# EAGLE board pulse-generator (EAGLE 7.7.0)
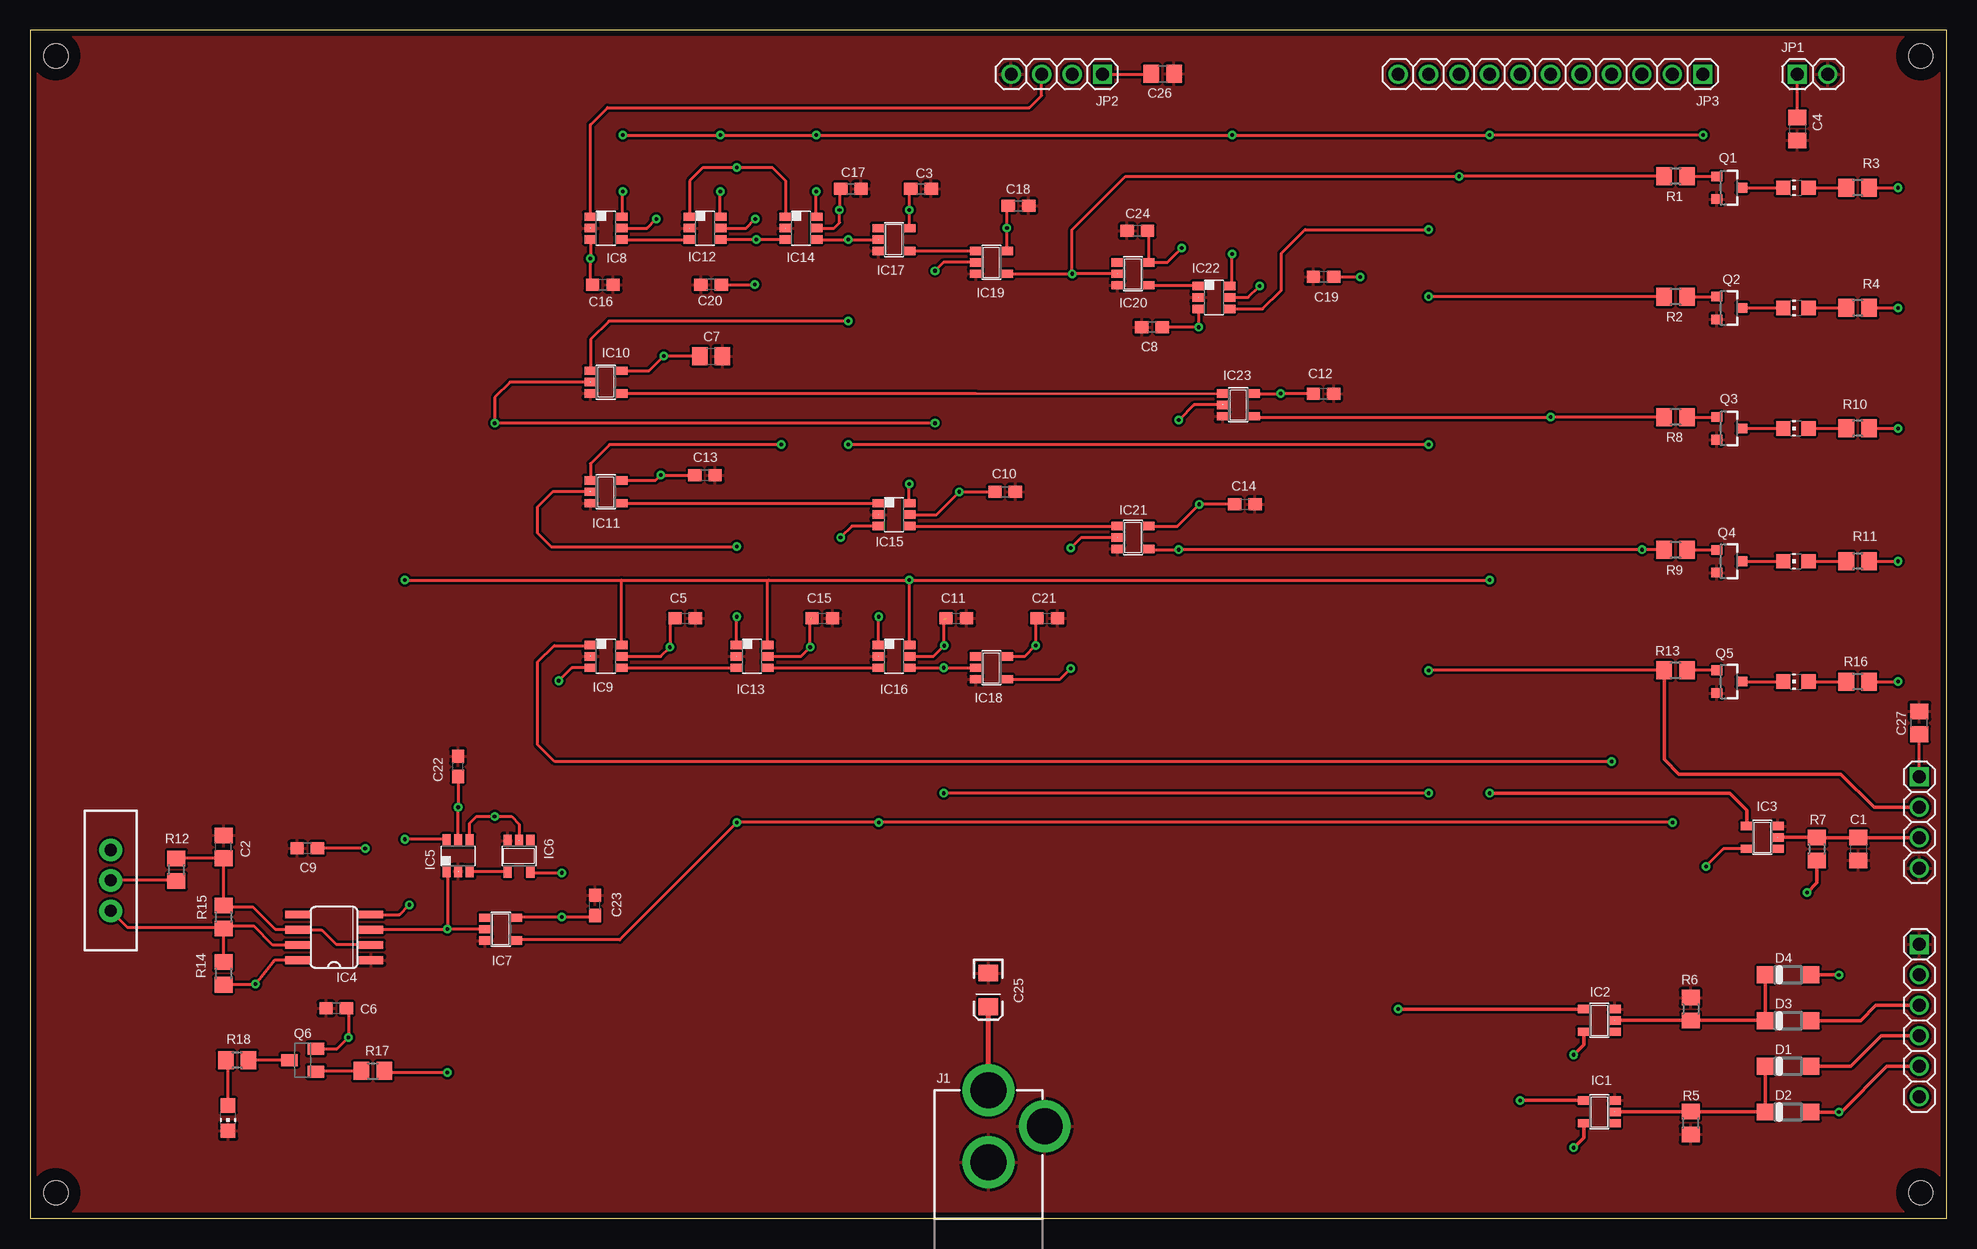
[diagram p0: board, top side]
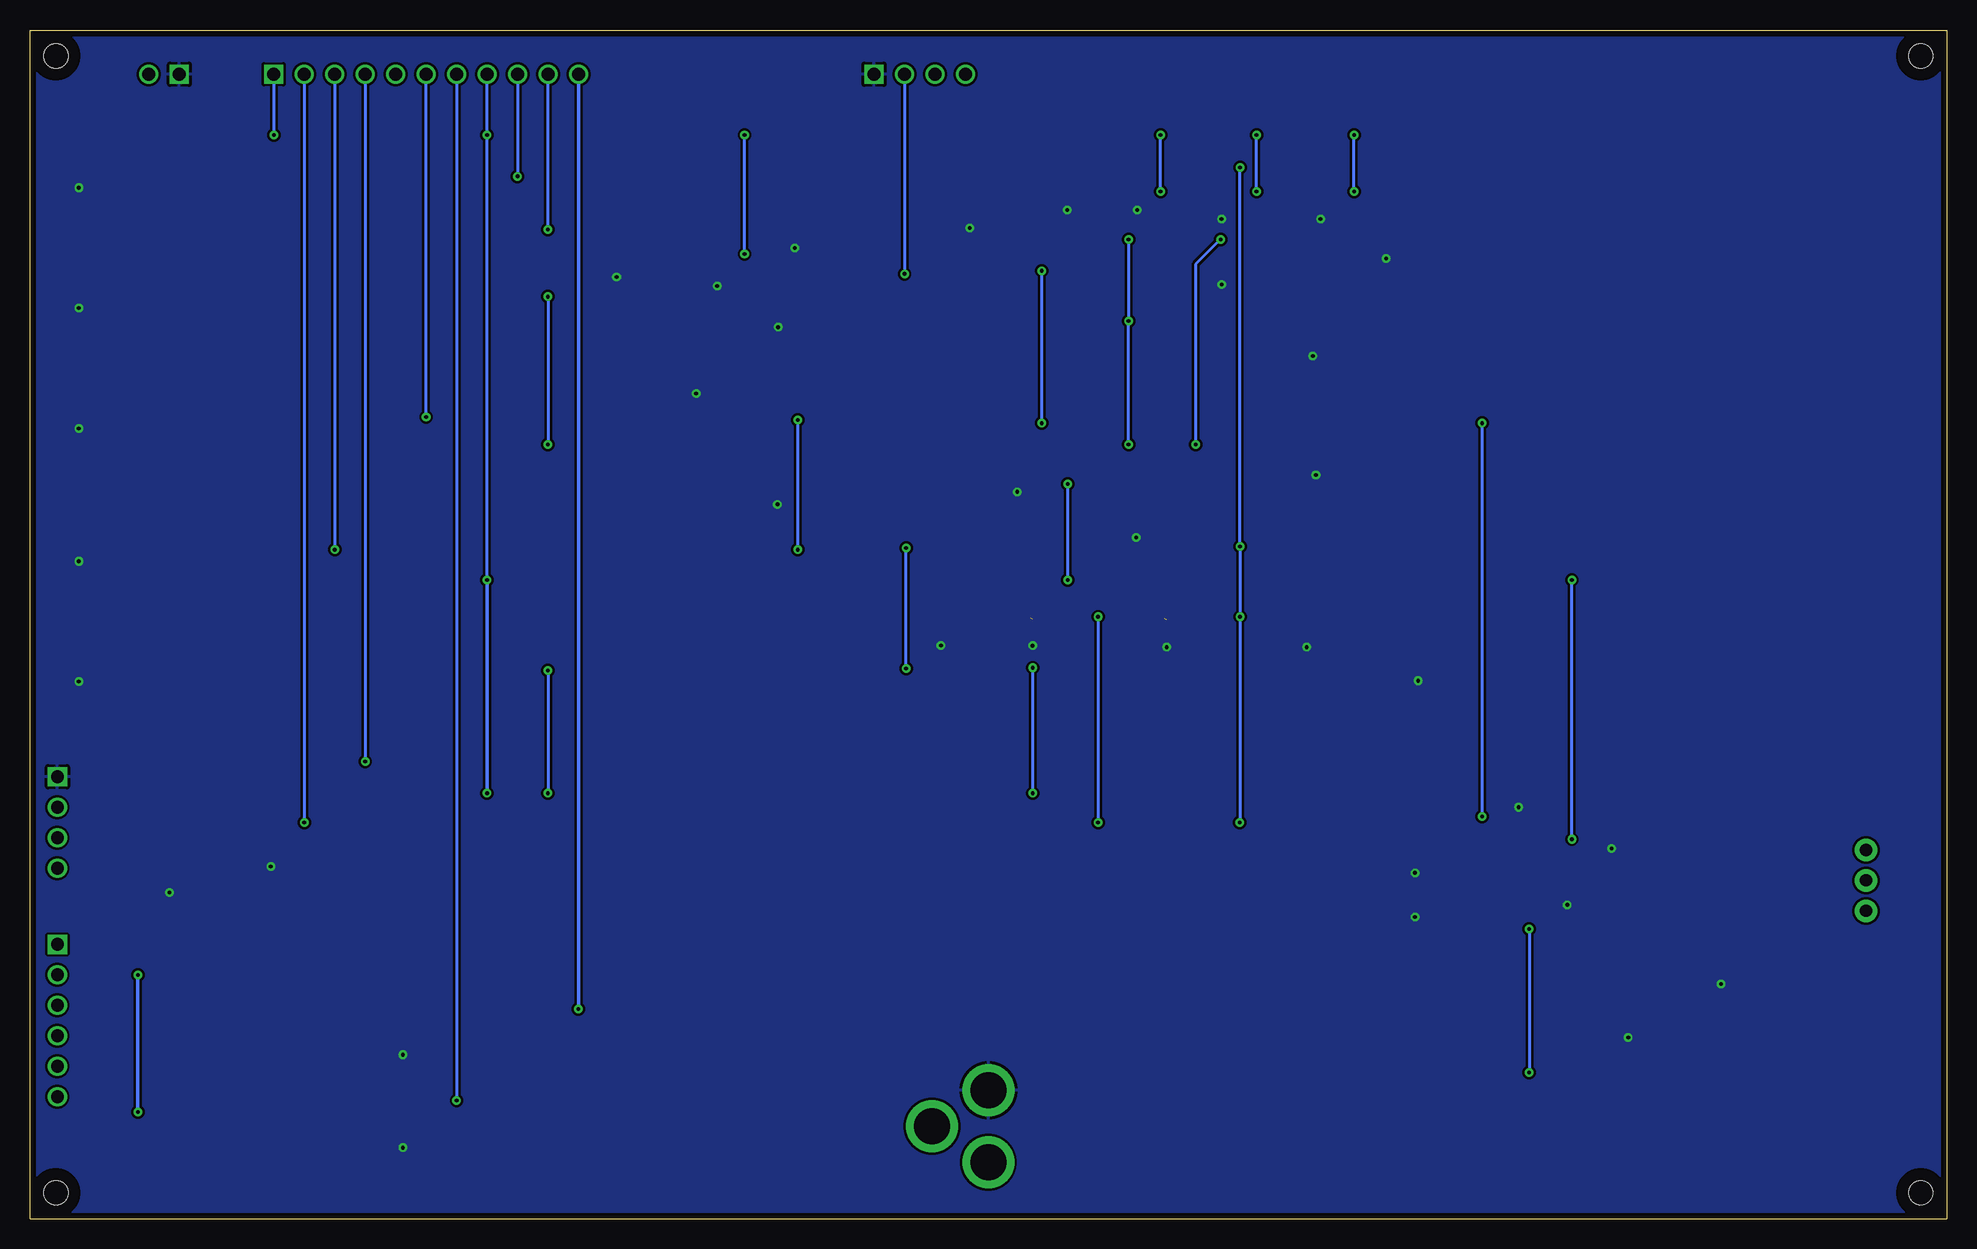
[diagram p1: board, bottom side, seen from below]

Size 159.77 x 99.06 mm. Coordinates in mm from the lower left corner, seen from the top.
Outline: 159.77,99.06 0,99.06 0,0 159.77,0 159.77,99.06
Copper layers (1*16): Top 0.035mm / dielectric 1.5mm / Bottom 0.035mm
Design rules "default *": minimum track width 8mil, minimum drill 12mil, track to track 8mil, track to pad 8mil, pad to pad 8mil, via to via 8mil, smd to smd 8mil, copper to edge 20mil, drill to drill 8mil, minimum pad ring 10mil, minimum via ring 8mil, stop-mask expansion 4mil, vias tented up to drill 0mil, thermal gap 10mil
Holes 2.01 mm at 2.16,2.16 157.61,2.16 157.61,96.9 2.16,96.9
tRestrict: area 155.6,0.2 to 159.6,4.2; area 155.6,94.9 to 159.6,98.9; area 0.2,94.9 to 4.2,98.9; area 0.2,0.2 to 4.2,4.2
bRestrict: area 155.6,0.2 to 159.6,4.2; area 155.6,94.9 to 159.6,98.9; area 0.2,94.9 to 4.2,98.9; area 0.2,0.2 to 4.2,4.2

## Footprints (pad centres in the part's own frame; a part is rotated, then mirrored left to right if it is on the bottom)
C0805 = smd 1.3 x 1.5: 1 -0.95,0; 2 0.95,0
C0603 = smd 1.1 x 1: 1 -0.85,0; 2 0.85,0
EIA3216 = smd 1.4 x 1.6: A 1.4,0; C -1.4,0
SOD123 = smd 1.4 x 1.4: A 1.9,0; C -1.9,0
SOT23-5 = smd 0.69 x 0.99: 1 -0.95,-1.29; 2 0,-1.29; 3 0.95,-1.29; 4 0.95,1.3; 5 -0.95,1.3
SO08 = smd 0.66 x 2.032: 1 -1.905,-3.073; 2 -0.635,-3.073; 3 0.635,-3.073; 4 1.905,-3.073; 5 1.905,3.073; 6 0.635,3.073; 7 -0.635,3.073; 8 -1.905,3.073
DBV_R-PDSO-G6 = smd 0.69 x 0.99: 1 -0.95,-1.29; 2 0,-1.29; 3 0.95,-1.29; 4 0.95,1.3; 5 0,1.3; 6 -0.95,1.3
POWER_JACK_PTH = drill 2.997 pad 4.318: GND 0,7.7; GNDBREAK 4.7,10.7; PWR 0,13.7
1X02 = drill 1.067 square: 1 -1.27,0 | drill 1.067: 2 1.27,0
1X04 = drill 1.067 square: 1 -3.81,0 | drill 1.067: 2 -1.27,0; 3 1.27,0; 4 3.81,0
1X11 = drill 1.067 square: 1 -12.7,0 | drill 1.067: 2 -10.16,0; 3 -7.62,0; 4 -5.08,0; 5 -2.54,0; 6 0,0; 7 2.54,0; 8 5.08,0; 9 7.62,0; 10 10.16,0; 11 12.7,0
1X06 = drill 1.067 square: 1 -6.35,0 | drill 1.067: 2 -3.81,0; 3 -1.27,0; 4 1.27,0; 5 3.81,0; 6 6.35,0
CHIP-LED0805 = smd 1.2 x 1.2: A 0,-1.05; C 0,1.05
SOT23-3 = smd 0.8 x 0.9: 1 -0.95,-1; 2 0.95,-1; 3 0,1.1
SOT23-BEC = smd 1 x 1.4: B -0.95,-1.1; C 0,1.1; E 0.95,-1.1
R0805 = smd 1.3 x 1.5: 1 -0.95,0; 2 0.95,0
SWITCH-SPDT = drill 1.016 pad 1.88: 1 0,2.54; 2 0,0; 3 0,-2.54

## Placement (x,y rotation side)
C1  0.1uF  [C0805]  152.4,30.81 270 top
C2  10uF  [C0805]  16.13,30.99 90 top
C3  0.1uF  [C0603]  74.27,85.83 0 top
C4  10uF  [C0805]  147.32,90.81 270 top
C5  0.1uF  [C0603]  54.61,50.04 0 top
C6  0.1uF  [C0603]  25.53,17.53 180 top
C7  0.1uF  [C0805]  56.77,71.88 0 top
C8  0.1uF  [C0603]  93.52,74.3 180 top
C9  0.1uF  [C0603]  23.11,30.86 180 top
C10  0.1uF  [C0603]  81.28,60.58 0 top
C11  0.1uF  [C0603]  77.22,50.04 0 top
C12  0.1uF  [C0603]  107.82,68.76 0 top
C13  0.1uF  [C0603]  56.26,61.98 0 top
C14  0.1uF  [C0603]  101.27,59.54 0 top
C15  0.1uF  [C0603]  66.04,50.04 0 top
C16  0.1uF  [C0603]  47.75,77.85 0 top
C17  0.1uF  [C0603]  68.43,85.83 0 top
C18  0.1uF  [C0603]  82.4,84.4 0 top
C19  0.1uF  [C0603]  107.82,78.49 180 top
C20  0.1uF  [C0603]  56.77,77.85 180 top
C21  0.1uF  [C0603]  84.79,50.04 0 top
C22  0.1uF  [C0603]  35.69,37.69 90 top
C23  0.1uF  [C0603]  47.09,26.11 90 top
C24  0.1uF  [C0603]  92.3,82.32 180 top
C25  10uF  [EIA3216]  79.88,19.08 270 top
C26  10uF  [C0805]  94.41,95.4 0 top
C27  10uF  [C0805]  157.48,41.33 90 top
D1  MBR0520LT  [SOD123]  146.56,12.7 0 top
D2  MBR0520LT  [SOD123]  146.56,8.89 0 top
D3  MBR0520LT  [SOD123]  146.56,16.51 0 top
D4  MBR0520LT  [SOD123]  146.56,20.32 0 top
IC1  74LVC1G17DBV  [SOT23-5]  130.81,8.9 90 top
IC2  74LVC1G17DBV  [SOT23-5]  130.81,16.52 90 top
IC3  74LVC1G17DBV  [SOT23-5]  144.4,31.78 90 top
IC4  NE555D  [SO08]  25.35,23.44 90 top
IC5  741G175  [DBV_R-PDSO-G6]  35.69,30.23 0 top
IC6  74LVC1G04DBV  [SOT23-5]  40.77,30.23 180 top
IC7  74LVC1G04DBV  [SOT23-5]  39.24,24.13 270 top
IC8  741G175  [DBV_R-PDSO-G6]  48.01,82.55 270 top
IC9  741G175  [DBV_R-PDSO-G6]  48.01,46.86 270 top
IC10  74LVC1G08DBV  [SOT23-5]  48.01,69.72 270 top
IC11  74LVC1G08DBV  [SOT23-5]  48.01,60.58 270 top
IC12  741G175  [DBV_R-PDSO-G6]  56.26,82.55 270 top
IC13  741G175  [DBV_R-PDSO-G6]  60.2,46.86 270 top
IC14  741G175  [DBV_R-PDSO-G6]  64.26,82.55 270 top
IC15  741G175  [DBV_R-PDSO-G6]  72.01,58.67 270 top
IC16  741G175  [DBV_R-PDSO-G6]  72.01,46.86 270 top
IC17  74LVC1G04DBV  [SOT23-5]  72.01,81.6 270 top
IC18  74LVC1G04DBV  [SOT23-5]  80.14,45.91 270 top
IC19  74LVC1G08DBV  [SOT23-5]  80.14,79.69 270 top
IC20  74LVC1G04DBV  [SOT23-5]  91.95,78.74 270 top
IC21  74LVC1G08DBV  [SOT23-5]  91.95,56.77 270 top
IC22  741G175  [DBV_R-PDSO-G6]  98.68,76.77 270 top
IC23  74LVC1G08DBV  [SOT23-5]  100.71,67.82 270 top
J1  POWER_JACKPTH  [POWER_JACK_PTH]  79.88,-3 0 top
JP1  [1X02]  148.59,95.38 0 top
JP2  [1X04]  85.6,95.38 180 top
JP3  [1X11]  126.75,95.38 180 top
JP4  [1X04]  157.48,33.02 270 top
JP5  [1X06]  157.48,16.51 270 top
LED1  [CHIP-LED0805]  147.19,85.92 90 top
LED2  [CHIP-LED0805]  147.19,75.9 90 top
LED3  [CHIP-LED0805]  147.19,65.86 90 top
LED4  [CHIP-LED0805]  147.19,54.79 90 top
LED5  [CHIP-LED0805]  147.19,44.75 90 top
LED6  [CHIP-LED0805]  16.51,8.38 180 top
Q1  MMBT2222A  [SOT23-3]  141.6,85.92 270 top
Q2  MMBT2222A  [SOT23-3]  141.6,75.9 270 top
Q3  MMBT2222A  [SOT23-3]  141.6,65.86 270 top
Q4  MMBT2222A  [SOT23-3]  141.6,54.79 270 top
Q5  MMBT2222A  [SOT23-3]  141.6,44.75 270 top
Q6  MMBT2907ALT1SMD  [SOT23-BEC]  22.73,13.21 90 top
R1  1K  [R0805]  137.16,86.87 180 top
R2  1K  [R0805]  137.16,76.83 180 top
R3  270  [R0805]  152.35,85.92 180 top
R4  270  [R0805]  152.35,75.9 180 top
R5  100k  [R0805]  138.43,7.98 90 top
R6  100k  [R0805]  138.43,17.48 270 top
R7  100k  [R0805]  148.95,30.81 270 top
R8  1K  [R0805]  137.16,66.8 180 top
R9  1K  [R0805]  137.16,55.73 180 top
R10  270  [R0805]  152.35,65.86 180 top
R11  270  [R0805]  152.35,54.79 180 top
R12  8.2K  [R0805]  12.19,29.08 270 top
R13  1K  [R0805]  137.16,45.69 180 top
R14  1K  [R0805]  16.13,20.45 270 top
R15  33K  [R0805]  16.13,25.15 270 top
R16  270  [R0805]  152.35,44.75 180 top
R17  1K  [R0805]  28.57,12.32 0 top
R18  270  [R0805]  17.27,13.21 180 top
S1  [SWITCH-SPDT]  6.73,28.19 0 top

## Library data of the parts
C1-C24 C26 C27 R1-R18 = resistor
C25 = SparkFun-Capacitors; PROD_ID: CAP-00811
D1-D4 = diode
IC1-IC3 IC6 IC7 IC10 IC11 IC17-IC21 IC23 = 74xx-little-us
IC4 = adafruit
IC5 IC8 IC9 IC12-IC16 IC22 = witch-e
J1 = SparkFun-Connectors; PROD_ID: PRT-00119
JP1-JP5 = custom-pinhead
LED1-LED6 = led
Q1-Q5 = SparkFun-DiscreteSemi; PROD_ID: TRANS-08049
Q6 = transistor-pnp
S1 = SparkFun-Electromechanical; PROD_ID: SWCH-08261

## Nets
9A_PULSE: IC22.4 JP3.10
10A_PULSE: IC19.4 IC20.2 JP2.2 JP3.9 R1.2
!CDONE: IC18.4 IC21.2
!EXE: C1.1 IC3.2 JP4.3 R7.1
!MCLK: IC7.4 IC11.2 IC12.1 IC13.1 IC14.1 IC16.1 JP3.2
!RST: IC3.4 IC5.6 IC8.6 IC9.6 IC12.6 IC13.6 IC14.6 IC15.6 IC16.6 IC22.6 JP3.1 JP3.8
!TDONE: IC17.4 IC19.1
ADD/COMP: IC1.4 JP3.7
CARRY_DONE: IC9.1 JP3.4
CARRY_INIT: IC11.1 IC12.4 IC14.3
CARRY_OE: IC21.4 IC23.2 JP3.3 R9.2
CARRY_PULSE: IC23.4 JP3.6 R8.2
CDONE: IC16.4 IC18.2 JP4.2 R13.2
CLR: IC2.4 JP3.11
FOUR: JP5.6
GND: C1.2 C2.2 C3.2 C4.2 C5.2 C6.2 C7.2 C8.2 C9.2 C10.2 C11.2 C12.2 C13.2 C14.2 C15.2 C16.2 C17.2 C18.2 C19.2 C20.2 C21.2 C22.2 C23.2 C24.2 C25.C C26.2 C27.2 IC1.3 IC2.3 IC3.3 IC4.1 IC5.2 IC6.3 IC7.3 IC8.2 IC9.2 IC10.3 IC11.3 IC12.2 IC13.2 IC14.2 IC15.2 IC16.2 IC17.3 IC18.3 IC19.3 IC20.3 IC21.3 IC22.2 IC23.3 J1.GND J1.GNDBREAK JP1.2 JP2.4 JP4.4 JP5.1 LED6.C Q1.2 Q2.2 Q3.2 Q4.2 Q5.2 R5.1 R6.1
MCLK: IC4.3 IC5.1 IC7.2 R17.2
N$1: IC5.3 IC6.4
N$2: C2.1 IC4.2 IC4.6 R12.1 R15.1
N$3: IC4.7 R14.1 R15.2 S1.3
N$4: R12.2 S1.2
N$5: Q6.B R17.1
N$6: Q6.C R18.1
N$7: LED6.A R18.2
N$8: IC8.4 IC12.3
N$9: IC10.4 IC23.1
N$10: LED3.C Q3.3
N$11: IC9.4 IC13.3
N$13: LED1.C Q1.3
N$15: IC15.4 IC21.1
N$16: IC11.4 IC15.1
N$17: IC13.4 IC16.3
N$18: D1.C D2.C IC1.2 R5.2
N$19: D3.C D4.C IC2.2 R6.2
N$23: IC20.4 IC22.1
N$24: Q3.1 R8.1
N$25: LED3.A R10.2
N$26: Q1.1 R1.1
N$28: LED1.A R3.2
N$31: LED2.C Q2.3
N$32: Q2.1 R2.1
N$33: LED2.A R4.2
N$34: LED4.C Q4.3
N$35: Q4.1 R9.1
N$36: LED4.A R11.2
N$37: LED5.C Q5.3
N$38: Q5.1 R13.1
N$39: LED5.A R16.2
ONE: D3.A JP5.3
TCLK: IC5.4 IC6.2 IC10.2 IC19.2
TDONE: IC10.1 IC14.4 IC17.2 R2.2
THREE: D2.A D4.A JP5.5
TWO: D1.A JP5.4
VCC: C3.1 C4.1 C5.1 C6.1 C7.1 C8.1 C9.1 C10.1 C11.1 C12.1 C13.1 C14.1 C15.1 C16.1 C17.1 C18.1 C19.1 C20.1 C21.1 C22.1 C23.1 C24.1 C25.A C26.1 C27.1 IC1.5 IC2.5 IC3.5 IC4.4 IC4.8 IC5.5 IC6.5 IC7.5 IC8.3 IC8.5 IC9.3 IC9.5 IC10.5 IC11.5 IC12.5 IC13.5 IC14.5 IC15.3 IC15.5 IC16.5 IC17.5 IC18.5 IC19.5 IC20.5 IC21.5 IC22.3 IC22.5 IC23.5 J1.PWR JP1.1 JP2.1 JP4.1 Q6.E R3.1 R4.1 R7.2 R10.1 R11.1 R14.2 R16.1
ZC: IC8.1 JP2.3
ZERO: JP5.2

## Tracks (layer width: path | path; a pad name or v marks a point on that pad's centre or on a via)
9A_PULSE  (via drill 0.3)
  Top 0.254: v116.59,82.42 106.27,82.42 104.29,80.44 104.29,77.37 102.75,75.82 IC22.4
  Bottom 0.254: v116.59,82.42 JP3.10
10A_PULSE  (via drill 0.3)
  Top 0.254: IC20.2 v86.87,78.74 | v86.87,78.74 86.87,82.42 91.31,86.87 v119.13,86.87 R1.2 | IC19.4 v86.87,78.74
  Bottom 0.254: JP3.9 v119.13,86.87 | JP2.2 v86.87,78.74
!CDONE  (via drill 0.3)
  Top 0.254: IC18.4 85.86,44.96 v86.74,45.85 | IC21.2 87.63,56.77 87.06,56.2 v86.74,55.88
  Bottom 0.254: v86.74,45.85 v86.74,55.88
!EXE
  Top 0.305: IC3.2 148.93,31.77 R7.1 C1.1 JP4.3
!MCLK  (via drill 0.3)
  Top 0.254: v136.91,33.02 v70.74,33.02 v58.93,33.02 49.15,23.24 40.6,23.24 IC7.4 | IC16.1 70.72,50.15 v70.74,50.16 | IC14.1 62.99,83.52 62.99,86.49 61.87,87.61 v58.91,87.61 56.11,87.61 54.99,86.49 54.99,83.52 IC12.1 | IC11.2 43.56,60.58 42.29,59.31 42.29,57.15 43.43,56.01 v58.91,56.01 | IC13.1 v58.91,50.16
  Bottom 0.254: JP3.2 v136.91,33.02 | 58.93,87.63 v58.91,87.61 v58.91,56.01 v58.91,50.16 58.91,50.04 58.91,33.04 v58.93,33.02 | v70.74,50.16 v70.74,33.02
!RST  (via drill 0.3)
  Top 0.254: 49.31,90.3 v49.4,90.3 v57.53,90.3 v65.53,90.3 v100.2,90.3 v121.67,90.3 v139.45,90.3 | IC22.6 100.2,77.94 v100.2,80.39 | IC9.6 49.31,53.21 | 61.59,53.21 v73.28,53.21 | v73.28,53.21 v121.67,53.21 | IC13.6 61.5,53.12 61.59,53.21 | IC16.6 73.31,53.18 v73.28,53.21 | IC12.6 arc-90 57.53,83.53 v57.53,85.6 | IC14.6 arc-90 65.53,83.53 v65.53,85.6 | IC8.6 arc90 49.4,83.6 v49.4,85.6 | v31.24,53.21 49.31,53.21 | 49.31,53.21 61.59,53.21 | IC5.6 34.64,31.62 v31.24,31.62 | IC15.6 arc-90 73.28,59.65 v73.28,61.21
  Top 0.305: v121.67,35.46 141.68,35.46 143.1,34.04 IC3.4
  Bottom 0.254: JP3.8 v121.67,90.3 v121.67,53.21 | v100.2,80.39 v100.2,90.3 | v57.53,85.6 v57.53,90.3 | v65.53,85.6 v65.53,90.3 | v49.4,85.6 v49.4,90.3 | JP3.1 v139.45,90.3 | v31.24,31.62 v31.24,53.21 | v73.28,61.21 v73.28,53.21
  Bottom 0.305: v121.67,53.21 v121.67,35.46
!TDONE
  Top 0.254: IC17.4 IC19.1
ADD/COMP  (via drill 0.3)
  Top 0.305: v124.21,9.85 IC1.4
  Bottom 0.254: JP3.7 v124.21,9.85
CARRY_DONE  (via drill 0.3)
  Top 0.254: IC9.1 46.66,47.75 43.69,47.75 42.29,46.35 42.29,39.55 43.74,38.1 v131.83,38.1
  Bottom 0.254: JP3.4 v131.83,38.1
CARRY_INIT  (via drill 0.3)
  Top 0.254: 46.74,61.55 IC11.1 46.71,62.92 48.31,64.52 v62.61,64.52 | IC12.4 57.58,81.58 57.6,81.61 v60.53,81.61 v60.54,81.6 IC14.3
  Bottom 0.254: v60.53,81.61 62.61,79.53 v62.61,64.52
CARRY_OE  (via drill 0.3)
  Top 0.254: IC21.4 93.31,55.75 v95.76,55.75 v134.37,55.75 134.39,55.73 R9.2 | IC23.2 97.03,67.82 v95.76,66.55
  Bottom 0.254: JP3.3 v134.37,55.75 | v95.76,55.75 v95.76,66.55
CARRY_PULSE  (via drill 0.3)
  Top 0.254: IC23.4 102.08,66.8 v126.75,66.8 R8.2
  Bottom 0.254: v126.75,66.8 JP3.6
CDONE  (via drill 0.3)
  Top 0.254: IC16.4 v76.17,45.91 IC18.2 | R13.2 v116.59,45.7 | v116.59,35.46 v76.17,35.46
  Top 0.305: R13.2 136.21,38.29 137.44,37.06 150.95,37.06 153.72,34.29 JP4.2
  Bottom 0.254: v116.59,45.7 v116.59,35.46 | v76.17,35.46 v76.17,45.91
CLR  (via drill 0.3)
  Top 0.305: v114.05,17.47 IC2.4
  Bottom 0.305: JP3.11 v114.05,17.47
GND
  pour Top: 0,0 159.77,0 159.77,99.06 0,99.06
MCLK  (via drill 0.3)
  Top 0.254: IC4.3 28.47,24.13 v34.8,24.13 | IC5.1 arc-90 34.8,28.88 v34.8,24.13 | IC7.2 v34.8,24.13 | R17.2 29.55,12.19 v34.8,12.19
  Bottom 0.254: v34.8,24.13 v34.8,12.19
N$1
  Top 0.254: IC5.3 39.81,28.94 IC6.4
N$2
  Top 0.254: IC4.2 28.37,22.86 25.53,22.86 24.31,24.08 IC4.6 22.23,24.13 20.45,24.13 18.58,26 16.13,26 R15.1 C2.1 R12.1
N$3
  Top 0.254: IC4.7 20.24,22.81 18.67,24.38 16.22,24.38 R15.2 | R14.1 R15.2 | S1.3 8.09,24.3 16.13,24.3 R15.2
N$4
  Top 0.254: R12.2 12.15,28.19 S1.2
N$5
  Top 0.254: Q6.B 23.89,12.32 R17.1
N$6
  Top 0.254: Q6.C R18.1
N$7
  Top 0.254: LED6.A 16.51,13.12 R18.2
N$8
  Top 0.254: IC8.4 IC12.3
N$9
  Top 0.254: IC10.4 78.84,68.77 IC23.1
N$10
  Top 0.254: Q3.3 LED3.C
N$11
  Top 0.254: IC9.4 IC13.3
N$13
  Top 0.254: Q1.3 LED1.C
N$15
  Top 0.254: IC15.4 IC21.1
N$16
  Top 0.254: IC11.4 IC15.1
N$17
  Top 0.254: IC13.4 IC16.3
N$18
  Top 0.305: D1.C D2.C 144.65,8.9 138.45,8.9 R5.2 132.12,8.93 IC1.2
N$19
  Top 0.305: D4.C D3.C 144.65,16.52 R6.2 IC2.2
N$23
  Top 0.254: IC20.4 97.32,77.79 IC22.1
N$24
  Top 0.254: R8.1 Q3.1
N$25
  Top 0.254: LED3.A R10.2
N$26
  Top 0.254: Q1.1 R1.1
N$28
  Top 0.254: LED1.A R3.2
N$31
  Top 0.254: Q2.3 LED2.C
N$32
  Top 0.254: R2.1 140.6,76.83 Q2.1
N$33
  Top 0.254: LED2.A R4.2
N$34
  Top 0.254: Q4.3 LED4.C
N$35
  Top 0.254: R9.1 140.6,55.73 Q4.1
N$36
  Top 0.254: LED4.A R11.2
N$37
  Top 0.254: Q5.3 LED5.C
N$38
  Top 0.254: Q5.1 138.12,45.7 R13.1
N$39
  Top 0.254: LED5.A R16.2
ONE
  Top 0.305: JP5.3 153.87,17.78 152.6,16.51 D3.A
TCLK  (via drill 0.3)
  Top 0.254: IC5.4 36.64,32.95 37.21,33.53 v38.73,33.53 40.13,33.53 40.77,32.89 IC6.2 | IC19.2 76.14,79.69 v75.44,78.99 | v75.44,66.29 v38.73,66.29 38.73,68.45 40.01,69.72 IC10.2
  Bottom 0.254: v38.73,66.29 v38.73,33.53 | v75.44,78.99 v75.44,66.29
TDONE  (via drill 0.3)
  Top 0.254: IC14.4 v68.2,81.6 IC17.2 | v68.2,74.8 48.26,74.8 46.74,73.28 46.74,70.69 IC10.1 | R2.2 v116.59,76.83 | v116.59,64.52 v68.2,64.52
  Bottom 0.254: v68.2,64.52 v68.2,74.8 v68.2,81.6 | v116.59,76.83 v116.59,64.52
THREE  (via drill 0.3)
  Top 0.305: JP5.5 154.79,12.7 150.98,8.89 v150.77,8.89 D2.A | D4.A v150.77,20.32
  Bottom 0.305: v150.77,20.32 v150.77,8.89
TWO
  Top 0.305: JP5.4 154.33,15.24 151.79,12.7 D1.A
VCC  (via drill 0.3)  (2 unrouted)
  Top 0.254: IC4.4 30.81,25.35 v31.62,26.16 | IC4.8 20.4,21.54 v18.8,19.56 16.17,19.56 R14.2 | IC5.5 v35.69,34.29 C22.1 | IC6.5 arc90 41.81,28.83 v44.32,28.83 | IC7.5 40.61,25.15 v44.32,25.15 47.09,25.15 C23.1 | Q6.E 25.59,14.16 v26.54,15.11 26.54,17.46 C6.1 | C4.1 JP1.1 | IC15.3 68.52,57.72 v67.56,56.77 | IC18.5 82.93,46.86 v83.83,47.78 83.83,49.78 C21.1 | IC16.5 75.31,46.86 v76.2,47.75 76.2,49.97 | IC13.5 64.26,46.86 v65.02,47.62 65.02,49.97 | IC9.5 52.58,46.86 v53.34,47.62 53.34,49.72 C5.1 | IC9.3 45.15,45.91 v44.07,44.83 44.13,44.77 | IC10.5 51.62,70.67 v52.83,71.88 C7.1 | IC8.5 51.44,82.55 v52.2,83.31 | IC12.5 59.69,82.55 v60.45,83.31 60.52,83.38 | IC22.5 101.54,76.77 v102.49,77.72 | v27.94,30.86 C9.1 | IC3.5 141.16,30.82 v139.7,29.36 | C16.1 46.72,77.94 46.71,77.94 v46.71,80.01 IC8.3 | IC11.5 52.13,61.53 v52.58,61.98 C13.1 | v96.01,80.9 94.8,79.69 IC20.5 93.25,82.23 arc90 C24.1 | IC22.3 97.41,75.82 v97.41,74.3 C8.1 | C19.1 v110.87,78.49 | IC23.5 102.02,68.76 v104.24,68.76 C12.1 | R3.1 v155.7,85.92 | R4.1 v155.7,75.89 | R11.1 v155.7,54.79 | R10.1 v155.7,65.86 | R16.1 v155.7,44.76 | IC17.5 v73.3,84.07 73.3,85.81 C3.1 | IC19.5 v81.43,82.55 81.43,84.39 C18.1 | IC15.5 75.56,58.67 v77.47,60.58 C10.1 | IC21.5 95.64,57.72 v97.46,59.54 C14.1 | C20.1 v60.43,77.85 | IC14.5 67.03,82.55 67.49,83.01 v67.49,84.06 v67.47,84.07 | v67.48,84.08 v67.47,84.07 | C17.1 67.47,85.72 v67.47,84.07 | JP2.1 93.46,95.38 C26.1 | JP4.1 C27.1
  Top 0.305: IC2.5 129.51,14.5 v128.68,13.66 | IC1.5 129.51,6.75 v128.68,5.92 | R7.2 148.95,27.99 v148.13,27.18
  Top 0.406: J1.PWR C25.A
  pour Bottom: 0,0 159.77,0 159.77,99.06 0,99.06
ZC
  Top 0.254: IC8.1 46.72,91.17 48.13,92.58 83.31,92.58 84.33,93.6 JP2.3

## Text on the board
Document: 10A PULSE | Pulse Generator | TDONE | CARRY PULSE | CARRY_OE | CDONE | MCLK